# Altium PCB AdaptiveLightingSatellite2.PcbDoc
Units mil, origin at the board's own origin, x right, y up, seen from the top; angles counter-clockwise.
Board outline 920 x 1230 mil, 2 copper layers (Top Layer, Bottom Layer); 25 components, 18 nets, 146 pads, 149 vias.
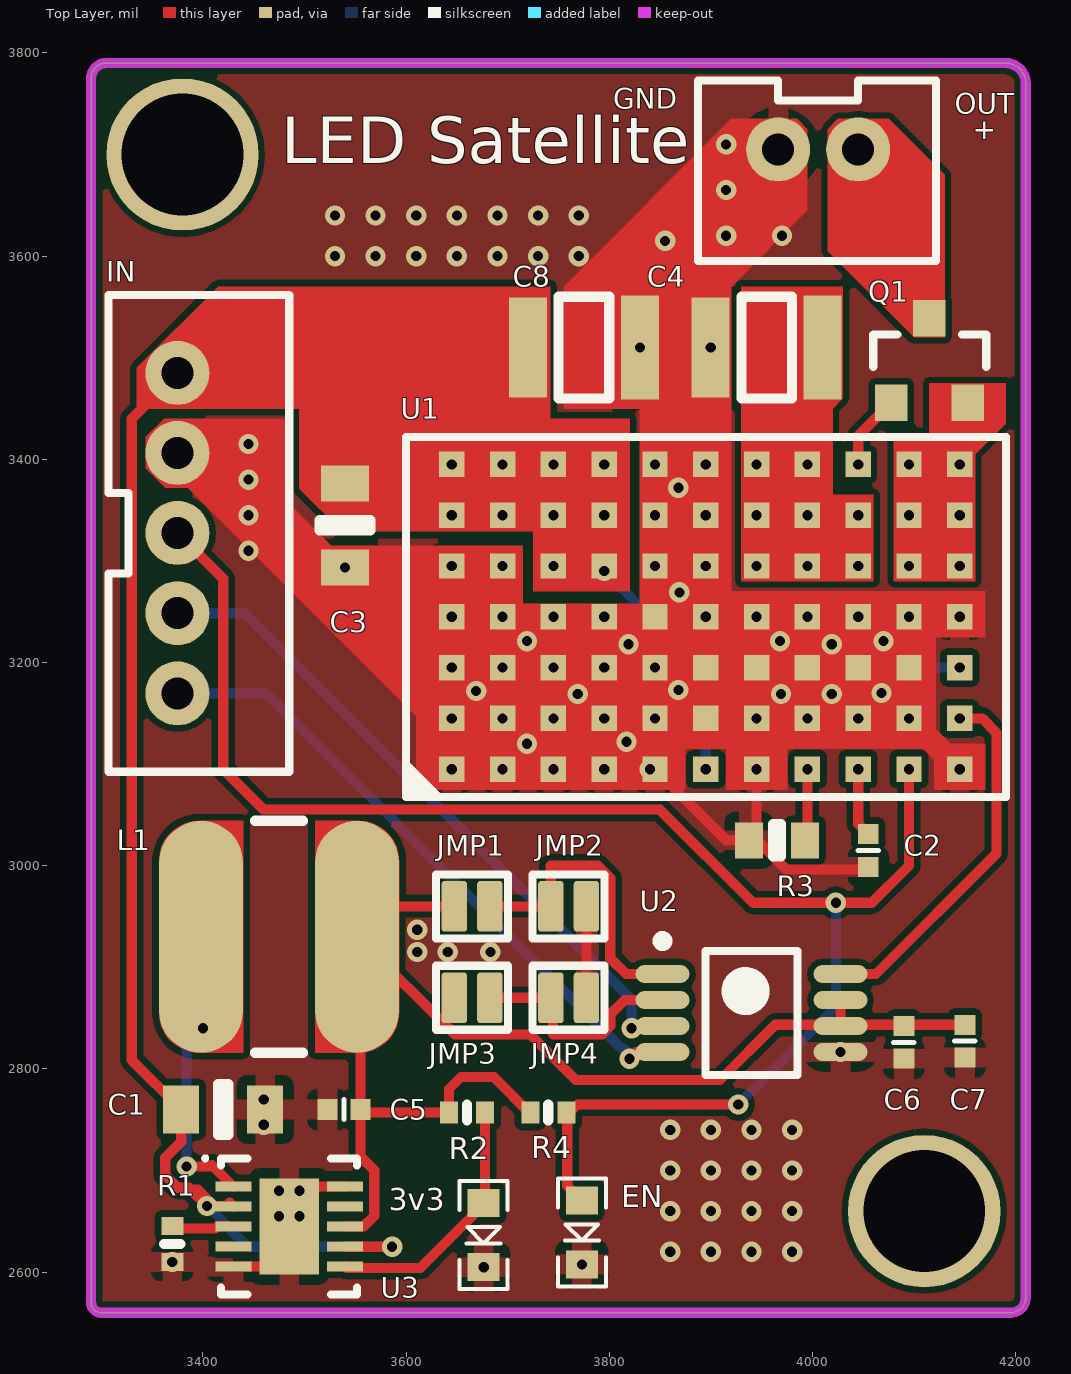
[diagram p0: Top Layer view]
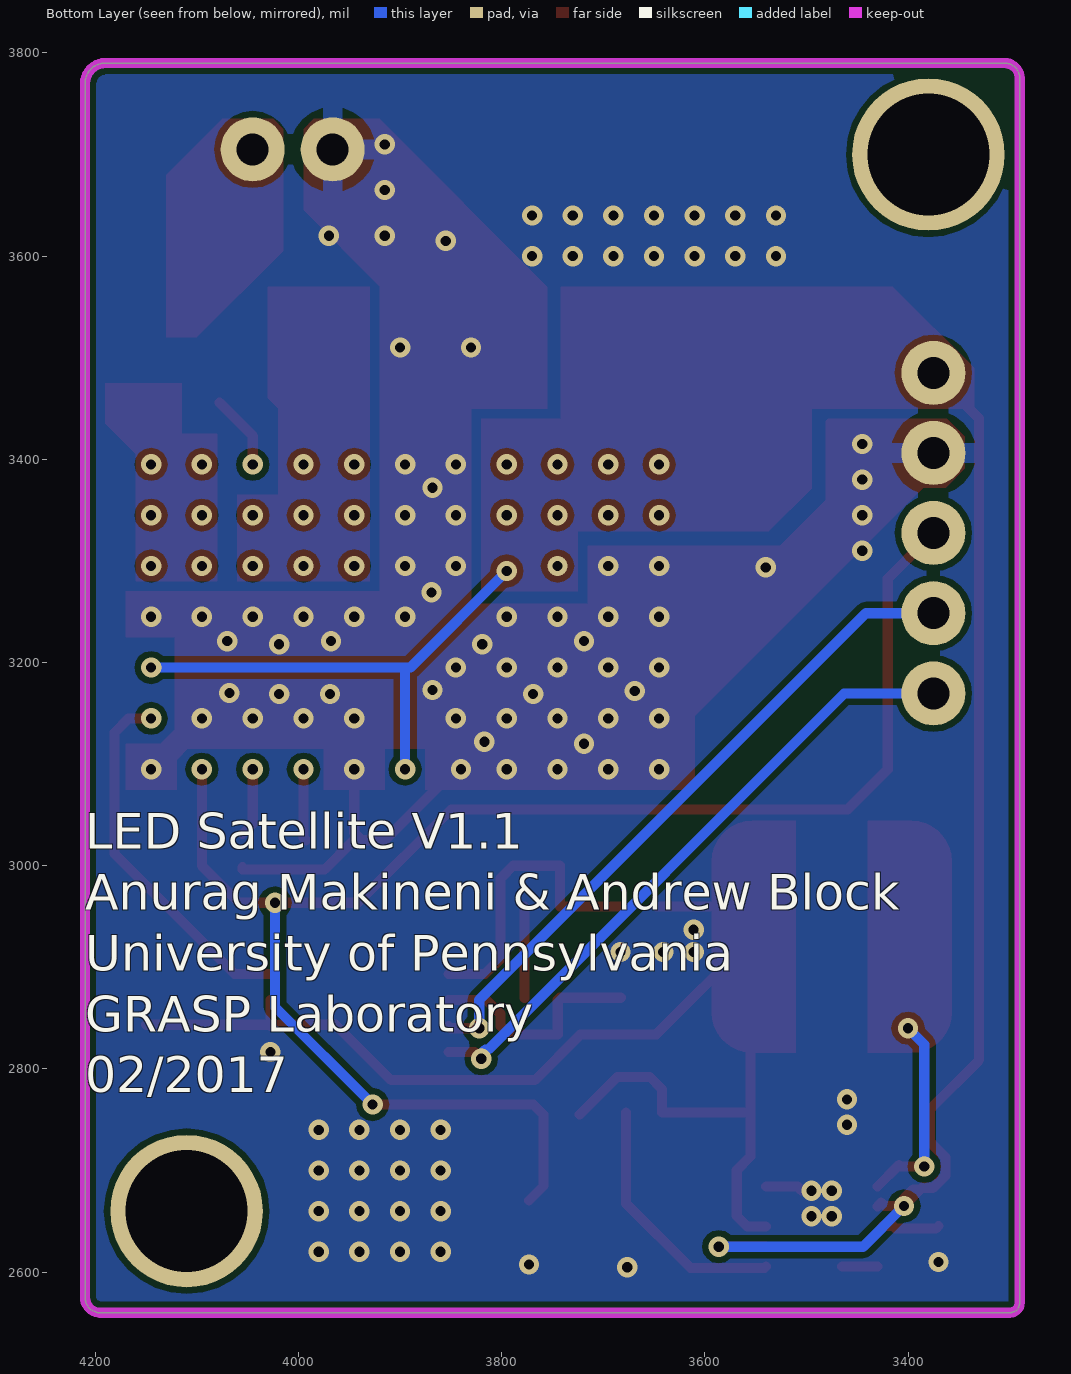
[diagram p1: Bottom Layer view, seen from below]
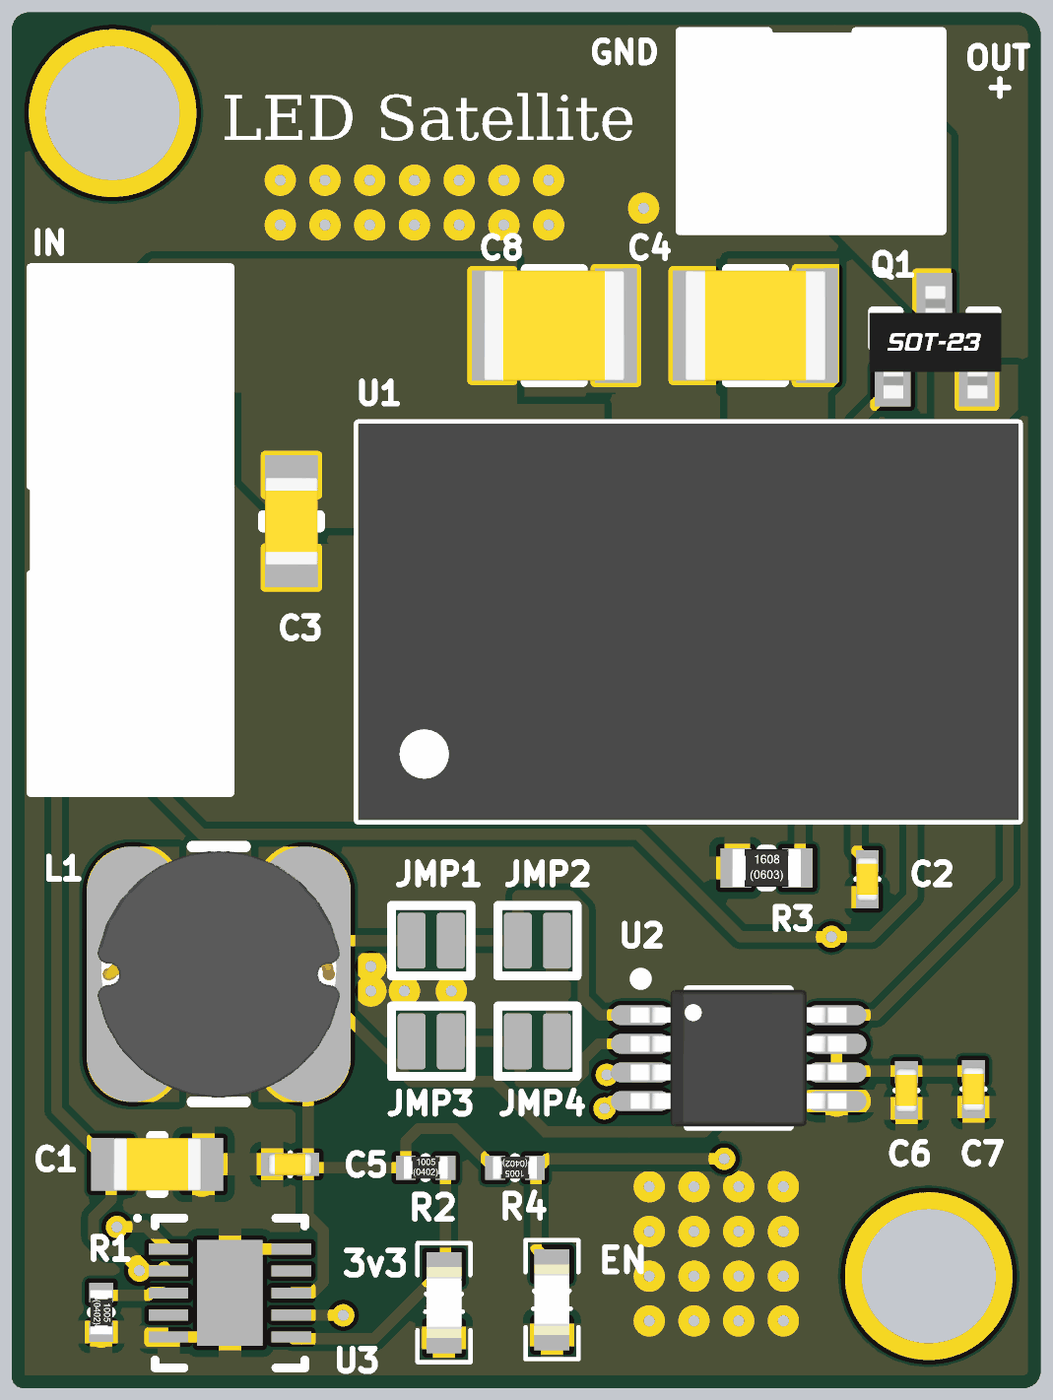
[diagram p2: 3D render of the assembled board from above, using the file's embedded part models]

## Layer stack, top to bottom
Top Solder: solder mask 0.4, Solder Resist, Dk 3.5
Top Layer: signal copper 1.4
Dielectric 1: dielectric 12.6, FR-4, Dk 4.8
Bottom Layer: signal copper 1.4
Bottom Solder: solder mask 0.4, Solder Resist, Dk 3.5

## Board outline
3290,2570 ccw(c3300,2570) 3300,2560 4195,2560 ccw(c4195,2575) 4210,2575 4210,3770 ccw(c4190,3770) 4190,3790 3305,3790 ccw(c3305,3775) 3290,3775

## Design rules (kind name [scope] priority, off if disabled: settings)
Clearance [All] p1: gap=6 ignorepadtopadclearanceinfootprint=FALSE
PolygonConnect PolygonConnect_1 [IsVia] p1: connectstyle=Direct reliefconductorwidth=10 reliefentries=4 polygonreliefangle="90 Angle" airgapwidth=10
PolygonConnect [All] p2: connectstyle=Relief reliefconductorwidth=20 reliefentries=4 polygonreliefangle="90 Angle" airgapwidth=10
RoutingVias [All] p1: holewidth=10 width=20 viastyle="Through Hole" minholewidth=10 minwidth=20 maxholewidth=10 maxwidth=20
SolderMaskExpansion SolderMaskExpansion_1 [IsVia] p1: expansion=1 soldermaskfromhole=TRUE
SolderMaskExpansion [All] p2: expansion=4
Width [All] p1: maxlimit=10 minlimit=10 preferedwidth=10
30 further rules are at their usual default settings.

## Components (designator, comment, footprint, x,y, rotation, side; value= is the part's Value field where it differs from the comment)
3v3 "LED_0603_BLUE_5mA" LED0603 3676.42,2636.34 r270 top (schematic designator D2)
C1 "1uF" C0805[2012X120] 3420,2760 r180 top
C2 "10nF 100V 0402" C0402[1005X55] 4055,3015 r90 top
C3 "1uF" C0805[2012X120] 3540,3335 r90 top
C4 "10uF 50V X5R +/-20% 1210" C1210[3225X150] 3955,3510 r180 top
C5 "10uF 6.3V 0402" C0402[1005X55] 3538.86,2760 r0 top
C6 "0.1uF 6.3V 0402" C0402[1005X55] 4090,2826.14 r270 top
C7 "4.7uF 6.3V 0402" C0402[1005X55] 4150,2827.28 r90 top
C8 "4.7uF 100V 1210" C1210[3225X200] 3775,3510 r180 top
EN "LED_0603_GREEN_5mA" LED0603 3773,2639 r270 top (schematic designator D1)
IN "JST_PH_5_VERT" JST-PH-5-PTH-VERT 3375,3327.52 r270 top (schematic designator JP1)
JMP1 "Solder Jumper" SOLDER-JUMPER 3665,2960 r90 top
JMP2 "Solder Jumper" SOLDER-JUMPER 3760,2960 r90 top
JMP3 "" SOLDER-JUMPER 3665,2870 r90 top
JMP4 "Solder Jumper" SOLDER-JUMPER 3760,2870 r90 top
L1 "SDR0604-470KL" SDR0604 3475,2930 r0 top
OUT "JST_PH_2_VERT" JST-PH-2-PTH-VERT 4005.63,3705 r180 top (schematic designator JP2)
Q1 "Si2319DS-T1-E3" SOT23-3 4115,3495 r0 top
R1 "56K2 1% 0402" R0402[1005] 3369.92,2627.72 r270 top
R2 "10K 1% 0402" R0402[1005] 3660,2757 r0 top
R3 "30.1K 1% 0603" R0603[1608] 3965,3025 r0 top
R4 "1K 1% 0402" R0402[1005] 3740,2757 r180 top
U1 "LTM8042" LGA-77 3895,3245 r90 top
U2 "DAC121C085" TSSOP-8 3940,2855 r0 top
U3 "LM5165YDRCR" "VSON-10 (3mmx3mm)" 3485,2645 r0 top

## Footprints (in the part's own frame and the unit in brackets; to place one, negate y for a bottom-side part, rotate by r counter-clockwise, add the part's x,y. Pads: shape width x height; smd on the part's side, far side on the other; paste and mask are expansions set on the pad)
C0402[1005X55] [mm] "Chip Capacitor, Body 1.0x0.5mm"
  rect 0.5x0.52 smd: 1(-0.41,0) 2(0.41,0)
  silkscreen extent 0,-0.25 0,0.25, body extent -0.5,-0.25 0.5,0.25, height 0.56
C0805[2012X120] [mm] "Chip Capacitor, Body 2.0x1.25mm"
  rect 0.9x1.2 smd: 1(-1.05,0) 2(1.05,0)
  silkscreen extent -0.13,-0.64 0.13,0.64, body extent -1,-0.6 1,0.6, height 1.21
C1210[3225X150] [mm] "Chip Capacitor, Body 3.2x2.5mm"
  rect 0.95x2.6 smd: 1(-1.4,0)
  rect 0.95x2.5 smd: 2(1.4,0)
  silkscreen extent -0.64,-1.27 0.64,1.27, body extent -1.6,-1.25 1.6,1.25, height 1.51
C1210[3225X200] [mm] "Chip Capacitor, Body 3.2x2.5mm"
  rect 0.95x2.6 smd: 1(-1.4,0)
  rect 0.95x2.5 smd: 2(1.4,0)
  silkscreen extent -0.64,-1.27 0.64,1.27, body extent -1.6,-1.25 1.6,1.25, height 1.99
JST-PH-2-PTH-VERT [mil]
  round 63 hole 31.5: 1(-39.37,0) 2(39.37,0)
  silkscreen extent -116,-68 118,110, body extent -116,-67 116,110, height 236
JST-PH-5-PTH-VERT [mil]
  round 63 hole 31.5: 1(-157.48,0) 2(-78.74,0) 3(0,0) 4(79,0) 5(158,0)
  silkscreen extent -234,-68 235,110, body extent -236,-69 232,108, height 236
LED0603 [mm]
  rect 0.7x0.8 smd: A(-0.8,0) C(0.8,0)
  silkscreen extent -1.35,-0.6 1.35,0.6, body extent -0.8,-0.4 0.8,0.4, height 0.75
LGA-77 [mil] "LGA, 77-Leads, Body 9.00x15.00mmx2.82mm, Pitch 1.27mm"
  rect 25x25 smd: A1(-150,250) A2(-100,250) A3(-50,250) A4(0,250) A5(50,250) A6(100,250) A7(150,250) B1(-150,200) B2(-100,200) B3(-50,200) B4(0,200) B5(50,200) B6(100,200) B7(150,200) C1(-150,150) C2(-100,150) C3(-50,150) C4(0,150) C5(50,150) C6(100,150) C7(150,150) D1(-150,100) D2(-100,100) D3(-50,100) D4(0,100) D5(50,100) D6(100,100) D7(150,100) E1(-150,50) E2(-100,50) E3(-50,50) E4(0,50) E5(50,50) E6(100,50) E7(150,50) F1(-150,0) F2(-100,0) F3(-50,0) F4(0,0) F5(50,0) F6(100,0) F7(150,0) G1(-150,-50) G2(-100,-50) G3(-50,-50) G4(0,-50) G5(50,-50) G6(100,-50) G7(150,-50) H1(-150,-100) H2(-100,-100) H3(-50,-100) H4(0,-100) H5(50,-100) H6(100,-100) H7(150,-100) J1(-150,-150) J2(-100,-150) J3(-50,-150) J4(0,-150) J5(50,-150) J6(100,-150) J7(150,-150) K1(-150,-200) K2(-100,-200) K3(-50,-200) K4(0,-200) K5(50,-200) K6(100,-200) K7(150,-200) L1(-150,-250) L2(-100,-250) L3(-50,-250) L4(0,-250) L5(50,-250) L6(100,-250) L7(150,-250)
  silkscreen extent -177,-295 177,295, body extent -177,-295 177,295, height 111
R0402[1005] [mm] "Chip Resistor, Body 1.0x0.5mm"
  rect 0.45x0.55 smd: 1(-0.45,0) 2(0.45,0)
  silkscreen extent 0,-0.2 0,0.2, body extent -0.5,-0.25 0.5,0.25, height 0.35
R0603[1608] [mm] "Chip Resistor, Body 1.55x0.85mm"
  rect 0.7x0.9 smd: 1(-0.7,0) 2(0.7,0)
  silkscreen extent -0.1,-0.4 0.1,0.4, body extent -0.77,-0.42 0.78,0.43, height 0.45
SDR0604 [mm]
  rrect100% 2.1x5.8 smd: 1(-1.95,0) 2(1.95,0)
  Top Layer region: -2,2.9 -0.9,2.9 -0.9,-2.9 -2,-2.9 -2.5,-2.766 -2.866,-2.4 -3,-1.9 -3,-1.9 -3,1.9 -2.866,2.4 -2.5,2.766 -2,2.9
  Top Layer region: 2,2.9 0.9,2.9 0.9,-2.9 2,-2.9 2.5,-2.766 2.866,-2.4 3,-1.9 3,-1.9 3,1.9 2.866,2.4 2.5,2.766 2,2.9
  silkscreen extent -0.6,-2.9 0.6,2.9, body extent -2.75,-2.8 2.75,2.8, height 4.55
SOLDER-JUMPER [mm]
  rrect25% 1.27x0.635 smd mask+0: 1(0,0.445) 2(0,-0.445)
  silkscreen extent -0.8,-0.9 0.8,0.9
SOT23-3 [mil]
  rect 32x36 smd: 1(-37.4,-39.37) 2(0,44) 3(38,-39.37)
  silkscreen extent -55,-4 56,28, body extent -58,-50 60,50, height 39
TSSOP-8 [mm] "TSOP, 8-Leads, Body 3.00x3.00mm, Pitch 0.65mm, IPC Medium Density"
  oval 1.35x0.45 smd: 1(-2.225,0.975) 2(-2.225,0.325) 3(-2.225,-0.325) 4(-2.225,-0.975) 5(2.225,-0.975) 6(2.225,-0.325) 7(2.225,0.325) 8(2.225,0.975)
  silkscreen extent -2.35,-1.55 1.15,1.92, body extent -2.45,-1.55 2.45,1.55, height 1.1
"VSON-10 (3mmx3mm)" [mm] "VSON, 10-Leads, Body 3.00x3.00mm, Pitch 0.50mm, Thermal Pad 2.40x1.49mm, IPC Medium Density"
  rect 0.9x0.25 smd: 1(-1.395,1) 2(-1.395,0.5) 3(-1.395,0) 4(-1.395,-0.5) 5(-1.395,-1) 6(1.395,-1) 7(1.395,-0.5) 8(1.395,0) 9(1.395,0.5) 10(1.395,1)
  rect 1.49x2.4 smd: 11(0,0)
  silkscreen extent -2.15,-1.7 1.7,1.75, body extent -1.55,-1.55 1.55,1.55, height 1

## Part data
C1 C3: library part CAP_1uF_100V_0805_20%, "CAP_1uF 50V 20% 0805 (2012 metric)"
C2: library part CAP_10nF_100V_0402_10%, "10nF 100V 10% 0402 (1005 Metric)"
C4: library part CAP_10uF_50V_1210_20%
C5: library part CAP_10uF_6.3V_0402_20%, "10uF 6.3V 20% 0402 (1005 Metric)"
C6: library part CAP_0.1uF_6.3V_0402_10%, "0.1uF 6.3V 10% 0402 (1005 Metric)"
C7: library part CAP_4.7uF_6.3V_0402_20%, "4.7uF 6.3V 20% 0402 (1005 Metric)"
C8: library part CAP_4.7uF_100V_1210_10%, "4.7uF 100V 10% 1210 (3225 Metric)"
JMP1 JMP2 JMP3 JMP4: library part SOLDER_JMPR
L1: "47uH 10% 0.72A 0604"
Q1: "P-Channel MOSFET"
R1: library part RES_56K2_0402_1%, "56K2 0.063W 1% 0402 (1005 Metric)"
R2: library part RES_10K_0402_1%, "10K 0.063W 1% 0402 (1005 Metric)"
R3: library part RES_30.1K_0603_1%, "30.1K 0.06W 1% 0603 (1005 Metric)"
R4: library part RES_1K_0402_1%, "1K 0.063W 1% 0402 (1005 Metric)"
U2: "12 Bit Digital to Analog Converter"
U3: "LM5165 3-V to 65-V Input, 150-mA Synchronous Buck Converter"

## Free pads (board coordinates)
  round 150 hole 120: 2(4110,2660) 3(3380,3700)

## Via types
v1: diameter 20, hole 10, Top Layer to Bottom Layer, 149 vias

## Nets (pads, with @x,y where several pads share a name; then routed paths per layer and width w, separated by ;. In a path a pad name is that pad's centre, name@x,y a point inside that pad or via, vN(x,y) a via of type N, cw(c..) or ccw(c..) an arc to the next point about the centre after c; other vN are vias at no path point)
3V3: C5.2 C6.1 C7.2 JMP1.1 JMP3.1 L1.2 R2.1 R4.2 U2.6 U2.7 U3.8 | length 1336
  Top Layer w10: U3.8 3558.43,2645 3568.64,2655.21 3568.64,2700.29 3555,2713.93 C5.2 ; JMP1.1 3581.77,2960 L1.2 L1.2@3555,2926.77 ; R4.2@3723.28,2755 3686.28,2792 3654,2792 3642.28,2780.28 R2.1 3558,2757 C5.2 ; U2.6 U2.6@4027.6,2843.43 ; U2.7 U2.6@4027.6,2843.43 ; C7.2 U2.6@4027.6,2843.43 ; C5.2 L1.2@3555,2926.77 ; L1.2@3555,2926.77 3647.77,2834 3722.06,2834 3767.06,2789 3909,2789 3963.43,2843.43 U2.6@4027.6,2843.43
BATT+: C1.2 C3.2 C8.2 IN.1 U1.A6 U1.A7 U1.B6 U1.B7 U1.C5 U1.C6 U1.C7 U1.D5 U1.D6 U1.D7 U1.F1 U1.L3 U3.2 U3.7 | length 1679.3
  Top Layer w10: IN.1 3330,3440 3330,2808.66 C1.2 3378.66,2728.36 3363,2712.7 3363,2695.3 3375.3,2683 3386.18,2683 3388.18,2681 ; v1(3404,2665) v1@3404.18,2665 ; U3.2 3426.47,2668.29 3423.18,2665 v1@3411.25,2665 ; U3.7 3540.24,2625 v1(3586.31,2625) ; 3388.18,2681 v1@3404.18,2665 ; 3388.18,2681 3395.25,2681 v1@3411.25,2665 ; v1@3404.18,2665 v1@3411.25,2665
  Bottom Layer w10: v1@3404,2665.18 v1(3404,2665) 3406.18,2665 3405.18,2664 3444.18,2625 v1(3586.31,2625) ; v1(3795,3290) 3890,3195 v1(4145,3195) ; v1(3895,3095) 3895,3190
  other v1: 3745,3295 3645,3345 3695,3345 3745,3345 3795,3345 3645,3395 3695,3395 3745,3395 3795,3395
CTL: U1.L2 U2.8 | length 363.5
  Top Layer w10: U2.8 4062.6,2893.39 4181,3011.79 4181,3131 4167,3145 v1(4145,3145)
ENABLE: EN.A IN.3 R4.1 U1.K1 | length 1591.9
  Top Layer w10: IN.3 3420,3282.52 3420,3095 3459.82,3055.18 3849.82,3055.18 3941.54,2963.46 v1(4023,2963.46) 4058.46,2963.46 4095,3000 v1(4095,3095) ; EN.A 3758.72,2684.78 3758.72,2755 3768.72,2765 v1(3927,2765)
  Bottom Layer w10: v1(3927,2765) 4023,2861 v1(4023,2963.46)
GND: 3v3.C C1.1 C2.1 C3.1 C4.2 C5.1 C6.2 C7.1 C8.1 EN.C IN.2 JMP2.2 JMP4.2 OUT.2 R1.2 R3.1 U1.A1 U1.A2 U1.A3 U1.A4 U1.A5 U1.B1 U1.B2 U1.B3 U1.B4 U1.B5 U1.C1 U1.C2 U1.C3 U1.C4 U1.D1 U1.D2 U1.D3 U1.D4 U1.E1 U1.E2 U1.E3 U1.E4 U1.E5 U1.E6 U1.E7 U1.F2 U1.F3 U1.F4 U1.F5 U1.F6 U1.F7 U1.G1 U1.G2 U1.G3 U1.G4 U1.H2 U1.H3 U1.H4 U1.J2 U1.J3 U1.J4 U1.K2 U1.K3 U1.K4 U1.L1 U1.L4 U2.5 U3.5 U3.10 U3.11 | length 488
  Top Layer w10: U3.5 U3.11@3465,2605.63 ; U3.11@3505,2680.61 3508.76,2684.37 U3.10 ; JMP4.2 JMP2.2 ; U1.E1 3915,3025 R3.1 ; v1(3945,3095) 3945,3032.56 R3.1 ; C2.1 4055,2996.28 3974.22,2996.28 3945.51,3025 R3.1
  other v1: 3676.42,2604.84 3773,2607.5 3369.92,2610 3860,2620 3900,2620 3940,2620 3980,2620 3475,2655 3495,2655 3860,2660 3900,2660 3940,2660 3980,2660 3475,2680 3495,2680 3860,2700 3900,2700 3940,2700 3980,2700 3860,2740 3900,2740 3940,2740 3980,2740 3460,2745 3460,2770 4027.6,2816.61 3611,2915 3641,2915 3683,2915 3611,2937 3645,3095 3695,3095 3745,3095 3795,3095 3840,3095 4145,3095 3719,3120 3817,3122 3645,3145 3695,3145 3745,3145 3795,3145 3845,3145 3945,3145 3995,3145 4045,3145 4095,3145 3769,3169 3969,3169 4019,3169 4068,3170 3669,3172 3868,3173 3645,3195 3695,3195 3745,3195 3795,3195 3845,3195 3819,3218 4019,3218 3719,3221 3968,3221 4070,3221 3645,3245 3695,3245 3745,3245 3795,3245 3895,3245 3945,3245 3995,3245 4045,3245 4095,3245 4145,3245 3869,3269 3540,3293.66 3645,3295 3695,3295 3845,3295 3895,3295 3445,3310 3445,3345 3845,3345 3895,3345 3868,3372 3445,3380 3845,3395 3895,3395 3445,3415 3830.12,3510 3899.88,3510 3530,3600 3570,3600 3610,3600 3650,3600 3690,3600 3730,3600 3770,3600 3855,3615 3915,3620 3970,3620 3530,3640 3570,3640 3610,3640 3650,3640 3690,3640 3730,3640 3770,3640 3915,3665 3915,3710
LED+: OUT.1 Q1.2
NetC2_2: C2.2 U1.J1 | length 68
  Top Layer w10: v1(4045,3095) 4045,3041.14 C2.2
NetC4_1: C4.1 U1.G5 U1.G6 U1.G7 U1.H5 U1.H6 U1.H7 U1.J5 U1.J6
  other v1: 3945,3295 3995,3295 4045,3295 3945,3345 3995,3345 4045,3345 3945,3395 3995,3395
NetD2_A: 3v3.A R2.2 U3.6 | length 254.1
  Top Layer w10: U3.6 3541.55,2604 3613.88,2604 3677.72,2667.83 R2.2
NetJMP1_2: JMP1.2 JMP2.1 U2.1 | length 300.2
  Top Layer w10: JMP1.2 JMP2.1 3742.48,3000 3788.75,3000 3801.02,2987.73 3801.02,2908.98 3816.61,2893.39 U2.1
NetJMP3_2: JMP3.2 JMP4.1 U2.2 | length 225.3
  Top Layer w10: JMP3.2 JMP4.1 3744.68,2867.8 3744.68,2834 3792.75,2834 3801.02,2842.27 3801.02,2853.73 3815.09,2867.8 U2.2
NetL1_1: L1.1 U3.1 | length 198
  Top Layer w10: v1(3384,2704) 3407.71,2704 3409,2705.29 3430,2684.29 U3.1
  Bottom Layer w10: v1(3384,2704) 3384,2824 v1(3400,2840)
NetQ1_1: Q1.1 U1.J7 | length 74.1
  Top Layer w10: v1(4045,3395) 4045,3423.03 Q1.1
NetQ1_3: Q1.3 U1.K5 U1.K6 U1.K7 U1.L5 U1.L6 U1.L7
  other v1: 4095,3295 4145,3295 4095,3345 4145,3345 4095,3395 4145,3395
NetR1_1: R1.1 U3.3 | length 57.4
  Top Layer w10: R1.1 3372.36,2643 3412.37,2643 3414.8,2645.43 3424.64,2645.43 U3.3@3425.08,2645
NetR3_2: R3.2 U1.H1 | length 71
  Top Layer w10: R3.2 3995,3027.44 v1(3995,3095)
SCL: IN.4 U2.3 | length 663.9
  Top Layer w10: v1(3822.02,2840) 3850.2,2840 U2.3
  Bottom Layer w10: IN.4 3441.48,3248.52 3822.02,2867.98 v1(3822.02,2840)
SDA: IN.5 U2.4 | length 632
  Top Layer w10: v1(3820,2810) 3826.61,2816.61 U2.4
  Bottom Layer w10: IN.5 3462.8,3169.52 3813.32,2819 3816,2819 3820,2815 v1(3820,2810)
pads on no net: U3.4 U3.9

## Polygon pours and split planes (outlines as drawn)
GND on Top Layer "Keep-Out Layer-No Net" (solid, remove dead copper, pour order 0): 3215,3835 4310,3835 4320,3845 4330,3835 4330,2465 3200,2465 3170,2495
GND on Bottom Layer "Keep-Out Layer-No Net" (solid, remove dead copper, pour order 2): 3210,3845 4305,3845 4315,3855 4325,3845 4325,2475 3195,2475 3165,2505

## Keep-outs
Keep-Out Layer:
  the board outline again, w10

## Other copper
Top Layer:
  region net BATT+: 3725,3329 3725,3270 3820,3270 3820,3440 3742,3440 3742,3570 3415,3570 3335,3490 3335,3450 3495,3450 3495,3371 3537,3329
  region net GND: 3755,3450 3755,3570 3920,3570 3920,3270 4170,3270 4170,3225 4121.5,3225 4121.5,3134.5 4136,3120 4170,3120 4170,3075 4120,3075 4120,3104 4109,3115 3975,3115 3975,3075 3915,3075 3915,3115 3875,3115 3875,3075 3610,3075 3610,3174 3514,3270 3514,3315 3585,3315 3715,3315 3715,3258 3830,3258 3830,3450
  region net GND: 3344,3391 3344,3422 3362,3440 3479,3440 3481,3438 3481,3360 3610,3231 3610,3147 3385,3372 3363,3372
  region net NetC4_1: 3930,3280 4060,3280 4060,3365 4020,3365 4020,3450 4030,3460 4030,3570 3930,3570
  region net NetQ1_3: 4080,3280 4160,3280 4160,3405 4190,3435 4190,3475 4115,3475 4115,3425 4080,3425
  region net GND: 3920,3570 3995,3645 3995,3725 3985,3735 3920,3735 3755,3570
  region net LED+: 4025,3735 4075,3735 4130,3680 4130,3520 4100,3520 4015,3605 4015,3725

## Silkscreen, mask and mechanical layers (free items; w line width, h text height)
Top Overlay:
  text "GND" at 3804,3745 h20
  text "+" at 4158,3715 h20
  text "LED Satellite" at 3477,3676 h78.74
Bottom Overlay:
  text "LED Satellite V1.1 / Anurag Makineni & Andrew Block / University of Pennsylvania / GRASP Laboratory / 02/2017" at 4210,2765 h60